# Altium PCB tof_board.PcbDoc
Units mm, origin at the board's own origin, x right, y up, seen from the top; angles counter-clockwise.
Board outline 9.53 x 6.35 mm, 2 copper layers (Top Layer, Bottom Layer); 5 components, 5 nets, 22 pads, 3 vias.
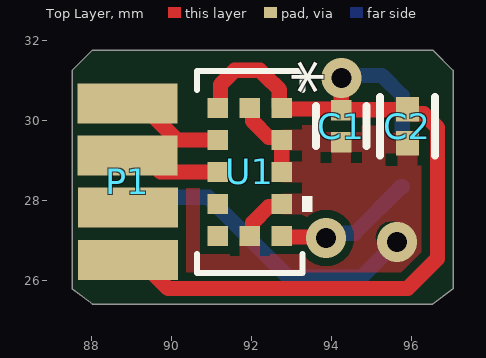
[diagram p0: Top Layer view]
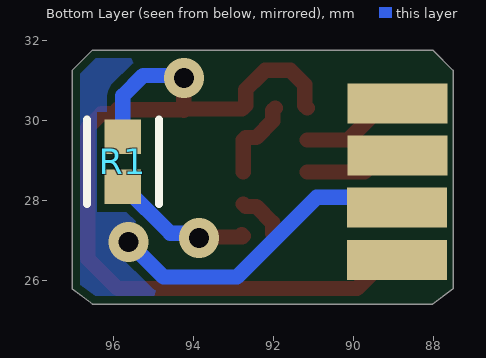
[diagram p1: Bottom Layer view, seen from below]
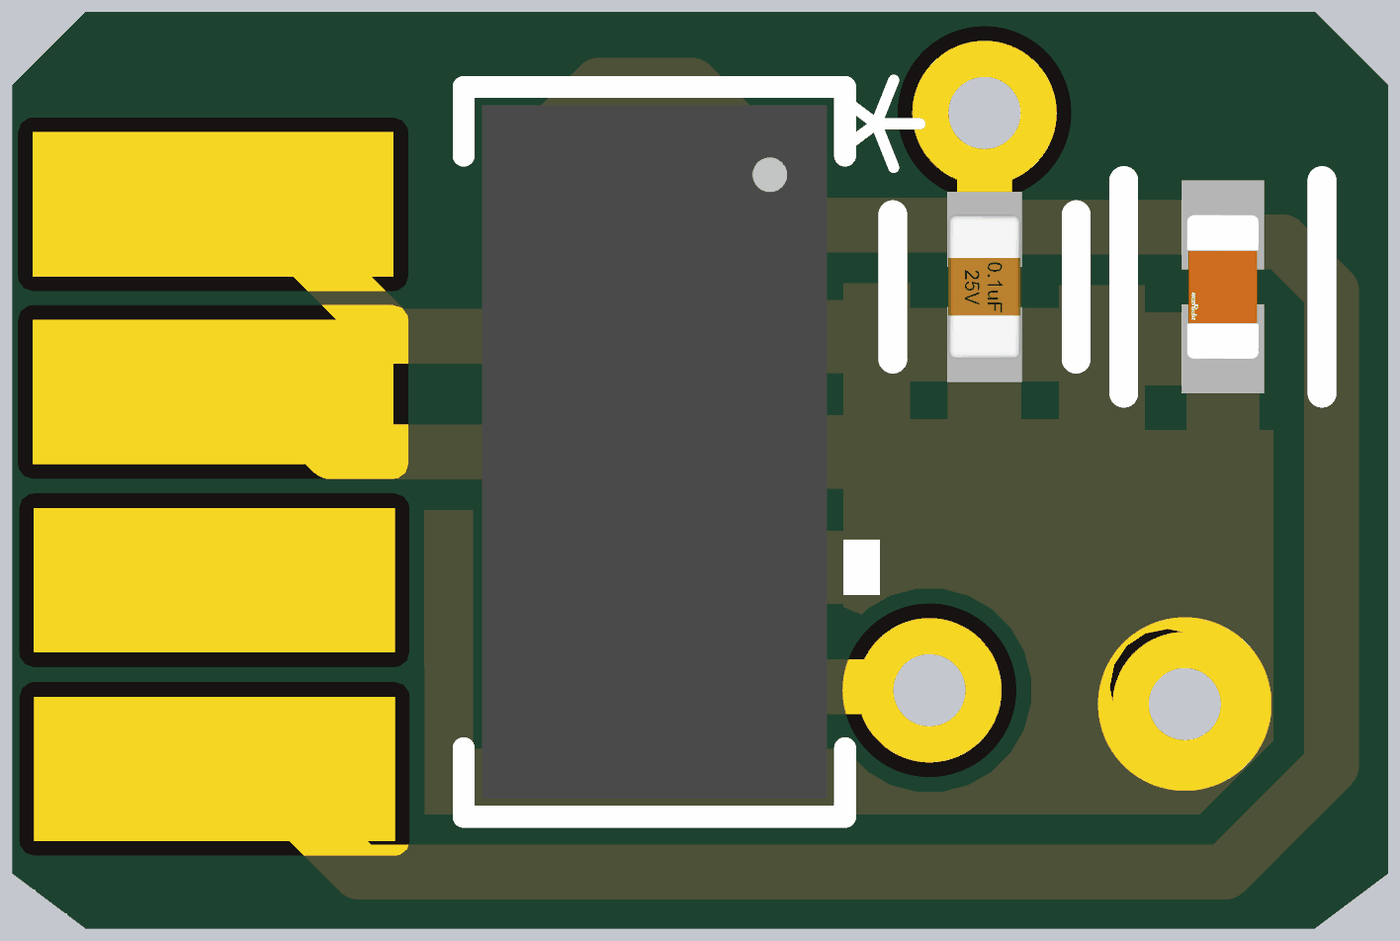
[diagram p2: 3D render of the assembled board from above, using the file's embedded part models]

## Layer stack, top to bottom
Top Solder: solder mask 0.0102, Solder Resist, Dk 3.5
Top Layer: signal copper 0.0356
Dielectric 1: dielectric 0.32, FR-4, Dk 4.8
Bottom Layer: signal copper 0.0356
Bottom Solder: solder mask 0.0102, Solder Resist, Dk 3.5

## Board outline
88.011,31.75 87.503,31.242 87.503,25.781 88.011,25.4 96.52,25.4 97.028,25.781 97.028,31.242 96.52,31.75

## Design rules (kind name [scope] priority, off if disabled: settings)
BoardOutlineClearance [All] p1: gap=0.2 ignorepadtopadclearanceinfootprint=FALSE except(0.4: Arc-SplitBarrior Arc-SplitContinuation Track-SplitBarrior Track-SplitContinuation SMDPad-SplitBarrior SMDPad-SplitContinuation THPad-SplitBarrior THPad-SplitContinuation Via-SplitBarrior Via-SplitContinuation Fill-SplitBarrior Fill-SplitContinuation Poly-SplitBarrior Poly-SplitContinuation Region-SplitBarrior Region-SplitContinuation Text-SplitBarrior Text-SplitContinuation)
Clearance "Clearance Bottom Layer" [OnLayer('Bottom Layer')] p1: gap=0.203 ignorepadtopadclearanceinfootprint=TRUE except(0.254: Arc-Text Track-Text SMDPad-Text THPad-Text Via-Text Fill-Text Poly-Text Region-Text Text-Text)
Clearance "Clearance Top Layer" [OnLayer('Top Layer')] p2: gap=0.203 ignorepadtopadclearanceinfootprint=TRUE except(0.254: Arc-Text Track-Text SMDPad-Text THPad-Text Via-Text Fill-Text Poly-Text Region-Text Text-Text)
Clearance [All] p3: gap=0.2 ignorepadtopadclearanceinfootprint=FALSE except(0.089: Arc-Arc Arc-Track Arc-SMDPad Track-Track Track-SMDPad SMDPad-SMDPad; 0.127: Arc-Via Track-Via SMDPad-Via THPad-Via Via-Via; 0.254: Arc-Text Track-Text SMDPad-Text THPad-Text Via-Text Fill-Text Poly-Text Region-Text Text-Text)
HoleSize [All] p1: absolutevalues=TRUE maxlimit=6.3 minlimit=0.2 maxpercent=80.000 minpercent=20.000
MinimumAnnularRing [All] p1: minimumring=0.076
MinimumSolderMaskSliver [All] p1: minsoldermaskwidth=0.1
PolygonConnect PolygonConnect_1 [All] p1: thpad.connectstyle=Relief thpad.reliefconductorwidth=0.508 thpad.reliefentries=4 thpad.polygonreliefangle="90 Angle" thpad.airgapwidth=0.254 smdpad.connectstyle=Relief smdpad.reliefconductorwidth=0.508 smdpad.reliefentries=4 smdpad.polygonreliefangle="90 Angle" smdpad.airgapwidth=0.254 via.connectstyle=Direct via.reliefconductorwidth=0.508 via.reliefentries=4 via.polygonreliefangle="90 Angle" via.airgapwidth=0.254
RoomDefinition tof_board [InComponentClass('tof_board')] p1: confinementstyle=ConfineIn formatcopy=TRUE lockcomponents=FALSE outline 98.171,26.924 103.759,26.924 103.759,39.878 98.171,39.878
RoutingCorners [All] p1: cornerstyle=Round minsetback=2.54 maxsetback=2.54
RoutingVias [All] p1: holewidth=0.5 width=1 viastyle="Through Hole" minholewidth=0.2 minwidth=0.4 maxholewidth=1 maxwidth=2
SilkToSilkClearance [All] p1: silktosilkclearance=0.1
SilkToSolderMaskClearance [IsPad] p1: minsilkscreentomaskgap=0.1 clearancetoexposedcopper=TRUE
SolderMaskExpansion [All] p1: expansion=0.102 istentingtop=FALSE
Width [All] p1: maxlimit=2.54 minlimit=0.089 preferedwidth=0.381
25 further rules are at their usual default settings.

## Components (designator, comment, footprint, x,y, rotation, side; value= is the part's Value field where it differs from the comment)
C1 "C0402C104K8PACTU" FP-C0402-BB-MFG 94.234,29.845 r270 top value="0.10 μF"
C2 "GRM155R60J475ME47D" FP-GRM155-0_1-IPC_B 95.885,29.845 r270 top
P1 "4pos_conn_tof" 4pos_conn_tof 88.87,30.363 r0 top
R1 "ERA-3AEB103V" FP-ERA3A-IPC_C 95.758,28.956 r270 bottom
U1 "VL53L1CBV0FY/1" QFN_BV0FY/1_STM 91.948,28.702 r270 top

## Footprints (in the part's own frame and the unit in brackets; to place one, negate y for a bottom-side part, rotate by r counter-clockwise, add the part's x,y. Pads: shape width x height; smd on the part's side, far side on the other; paste and mask are expansions set on the pad)
4pos_conn_tof [mm]
  rect 2.5x1 all layers, no hole: 1(0.022,0.054) 2(0.022,-1.246) 3(0.03,-2.55) 4(0.032,-3.856)
FP-C0402-BB-MFG [mm]
  rect 0.52x0.52 smd paste+0 mask+0: 1(-0.4,0) 2(0.4,0)
  silkscreen extent -0.5,-0.64 0.5,0.64, body extent -0.8,-0.4 0.8,0.4, height 0.25
FP-ERA3A-IPC_C [mm]
  rect 0.855x0.906 smd paste+0 mask+0: 1(-0.626,0) 2(0.626,0)
  silkscreen extent -1.05,-0.9 1.05,0.9, body extent -0.8,-0.4 0.8,0.4, height 0.55
FP-GRM155-0_1-IPC_B [mm]
  rect 0.615x0.572 smd paste+0 mask+0: 1(-0.429,0) 2(0.429,0)
  silkscreen extent -0.74,-0.69 0.74,0.69, body extent -0.89,-0.44 0.89,0.44, height 0.25
QFN_BV0FY/1_STM [mil]
  rect 20x20 smd paste+0 mask+0: 1(-63,31.5) 2(-31.5,31.49) 3(0,31.49) 4(31.5,31.49) 5(63,31.5) 6(63,0) 7(63,-31.5) 8(31.5,-31.49) 9(0,-31.49) 10(-31.5,-31.49) 11(-63,-31.5) 12(-63,0)
  silkscreen extent -100,-52 100,61, body extent -94,-47 94,47, height 63

## Part data
C1: library part CMP-2008-02046-2, "CAP CER 0.1UF 10V X5R 0402", Capacitance="0.10 μF", Manufacturer=Kemet, Package=C0402-BB, Temperature="-55°C to +125°C", Temperature Characteristic=X5R, Temperature Coefficient=15%, Temperature Range High=+125°C, Temperature Range Low=-55°C, Tolerance=0.1, Voltage Rating="10 V", Automotive=No, Category=Cap, ComponentLink2Description=Datasheet, ComponentLink2URL=https://content.kemet.com/datasheets/KEM_C1002_X7R_SMD.pdf, Device Class L1="Passive Components", Device Class L2=Capacitors, Device Class L3="Ceramic Capacitors", Digikey Description="CAP CER 0.1UF 10V X5R 0402", Height=0.55mm, Ipc Land Pattern Name=CAPC10050X50, Lead Free=Yes, Manufacturer Part Number=C0402C104K8PACTU, Material=Ceramic, Mouser Description="Capacitor 100 nF 10 VDC 0402", Octopart=https://octopart.com/c0402c104k8pactu-kemet-140039, RoHS=TRUE
C2: library part CMP-2008-04549-2, "Chip Multilayer Ceramic Capacitors for General Purpose, 0402, 4.7uF, X5R, 15%, 20%, 6.3V", Capacitance=4.7uF, Case Code (Imperial)=0402, Case Code (Metric)=1005, Dielectric=X5R, Max Operating Temperature=85°C, Min Operating Temperature=-55°C, Package Quantity=10000, Tolerance=20%, Voltage=6.3V, Case/Package=0402, Contact Plating=Tin, Depth=0.5mm, Height=0.5mm, Lead Free="Lead Free", Length=1mm, Mount="Surface Mount", Packaging="Tape and Reel", REACH SVHC="No SVHC", Termination=SMD/SMT, Thickness=0.022inch, Voltage Rating=6.3V, Voltage Rating (DC)=6.3V, Weight=0.000212oz, Width=0.02inch
R1: library part CMP-2000-00874-2, "RES SMD 10K OHM 0.1% 1/10W 0603", Case Code (Imperial)=0603, Case Code (Metric)=1608, Max Operating Temperature=155°C, Max Power Dissipation=100mW, Min Operating Temperature=-55°C, Package Quantity=5000, Resistance=10kR, Resistance Tolerance=0.1%, Resistor Type="Thin Film", Temperature Coefficient=25ppm/°C, Voltage Rating=75V, Case/Package=0603, Construction=Rectangular, Contact Plating=Tin, Depth=0.8mm, Height=0.45mm, Lead Free="Lead Free", Length=1.6mm, Military Standard=Not, Mount="Surface Mount", Number of Pins=2, Number of Terminations=2, Packaging="Tape and Reel", Power Rating=100mW, Radiation Hardening=No, REACH SVHC="No SVHC", RoHS Compliant=Yes, Series=ERA-3A, Size Code=0603, Technology="METAL FILM", Termination=SMD/SMT, Tolerance=0.1%, Voltage Rating (DC)=75V, Width=0.8mm
U1: "No Description Available", Mfr_Name=STMicroelectronics, Copyright="Copyright (C) 2022 Ultra Librarian. All rights reserved.", Manufacturer_Part_Number=VL53L1CBV0FY/1, RefDes=RefDes, Type=DEV

## Via types
v1: diameter 1, hole 0.5, Top Layer to Bottom Layer, 3 vias

## Nets (pads, with @x,y where several pads share a name; then routed paths per layer and width w, separated by ;. In a path a pad name is that pad's centre, name@x,y a point inside that pad or via, vN(x,y) a via of type N, cw(c..) or ccw(c..) an arc to the next point about the centre after c; other vN are vias at no path point)
GND: C1.2 C2.2 U1.2 U1.3 U1.4 U1.6 U1.12 | length 11.5
  Top Layer w0.381: U1.6 92.011,27.165 92.011,27.43 92.42,27.838 92.684,27.838 U1.4 ; U1.12 92.011,30.239 92.011,29.974 92.42,29.566 92.684,29.566 U1.2 U1.3 ; v1@95.503,27.074 v1(95.621,26.955)
  Bottom Layer w0.381: 88.9,28.067 90.916,28.067 92.907,26.076 94.742,26.076 v1(95.621,26.955)
NetR1_2: R1.2 U1.5 | length 3.6
  Top Layer w0.381: U1.5@92.786,27.14 U1.5 92.773,27.076 93.828,27.076 v1(93.853,27.051)
  Bottom Layer w0.381: v1(93.853,27.051) 93.971,27.169 94.571,27.169 95.732,28.33 R1.2
SCL: U1.10 | length 2.7
  Top Layer w0.381: 88.9,30.607 89.027,30.607 90.132,29.502 U1.10
SDA: U1.9 | length 2.5
  Top Layer w0.381: 88.9,29.337 89.081,29.337 89.716,28.702 U1.9
VDD: C1.1 C2.1 R1.1 U1.1 U1.11 | length 22.2
  Top Layer w0.381: 88.9,26.797 89.907,25.79 95.894,25.79 96.638,26.534 96.638,29.815 96.296,30.156 C2.1@95.981,30.156 ; U1.11 91.211,30.366 91.211,30.886 91.567,31.242 92.202,31.242 92.329,31.115 92.685,30.759 92.685,30.366 U1.1 92.777,30.274 94.205,30.274 C1.1 ; v1(94.234,31.05) C1.1 ; C2.1 95.871,30.259 94.248,30.259 C1.1
  Bottom Layer w0.381: v1(94.234,31.05) 94.299,31.115 95.25,31.115 95.758,30.607 R1.1
pads on no net: P1.1 P1.2 P1.3 P1.4 U1.7 U1.8

## Polygon pours and split planes (outlines as drawn)
no net on Layer0 "Default Coverlay 1 Top" (split plane): 87.884,31.623 87.503,31.242 87.503,25.781 87.757,25.527 96.647,25.527 97.028,25.908 97.028,31.115 96.647,31.623
no net on Layer0 "Default Coverlay 1 Bottom" (split plane): 87.884,31.623 87.503,31.242 87.503,25.781 87.757,25.527 96.647,25.527 97.028,25.908 97.028,31.115 96.647,31.623
GND on Top Layer "GND_L01_P002" (solid, remove dead copper, pour order 2): 88.011,31.75 87.503,31.242 87.503,25.781 88.011,25.4 96.52,25.4 97.028,25.781 97.028,31.242 96.52,31.75
GND on Bottom Layer "GND_L02_P003" (solid, remove dead copper, pour order 3): 88.011,31.75 87.503,31.242 87.503,25.781 88.011,25.4 96.52,25.4 97.028,25.781 97.028,31.242 96.52,31.75

## Text inside footprints (layer, text, board x,y; h text height)
U1: Top 3D Body "*" at 92.513,30.366 h1.27 r270; Top Overlay "*" at 92.513,31.509 h1.27 r270